# Altium PCB BananaSchplit-Mini-USBCPD-PCB.PcbDoc
Units mm, origin at the board's own origin, x right, y up, seen from the top; angles counter-clockwise.
Board outline 42.5 x 15 mm, 2 copper layers (Top Layer, Bottom Layer), stack 1.27 mm thick; 47 components, 30 nets, 159 pads, 125 vias.
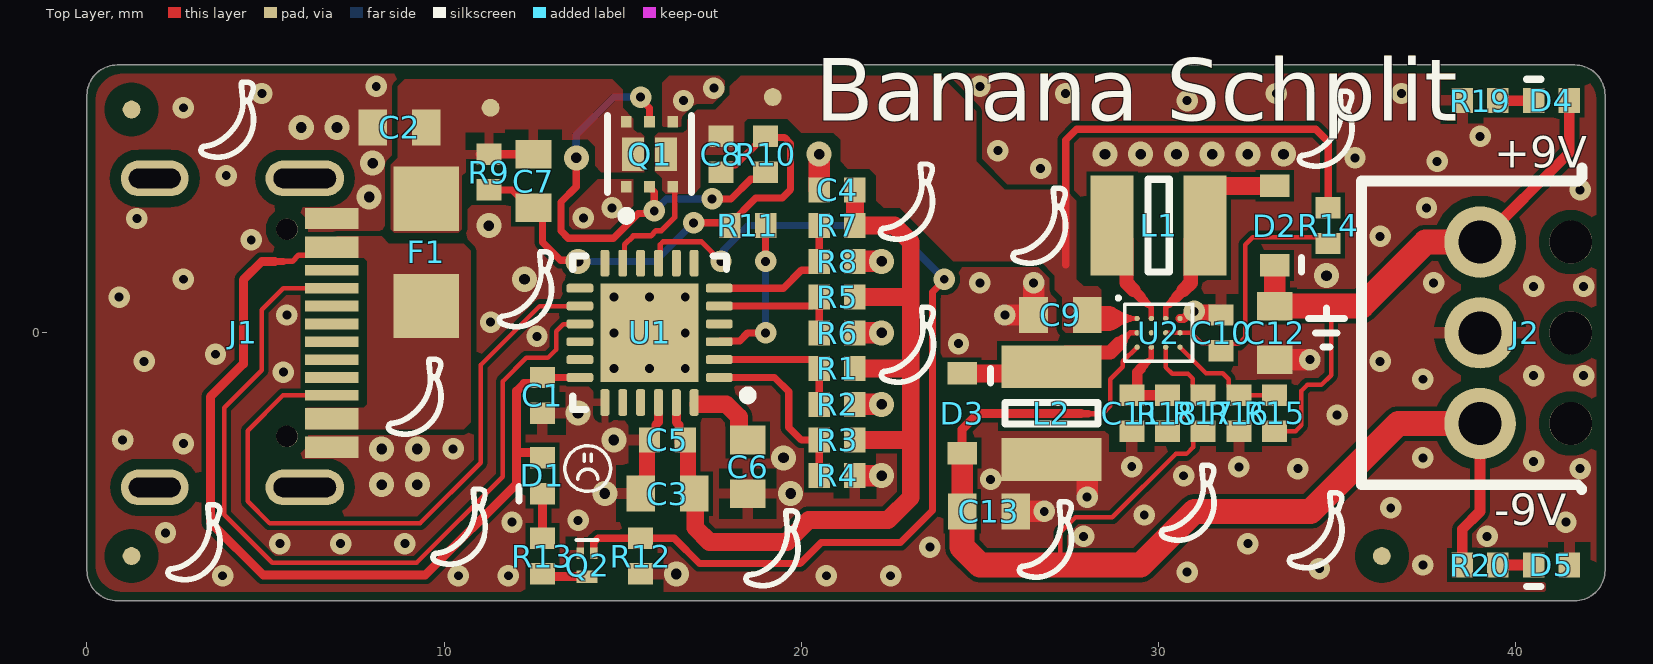
[diagram p0: Top Layer view]
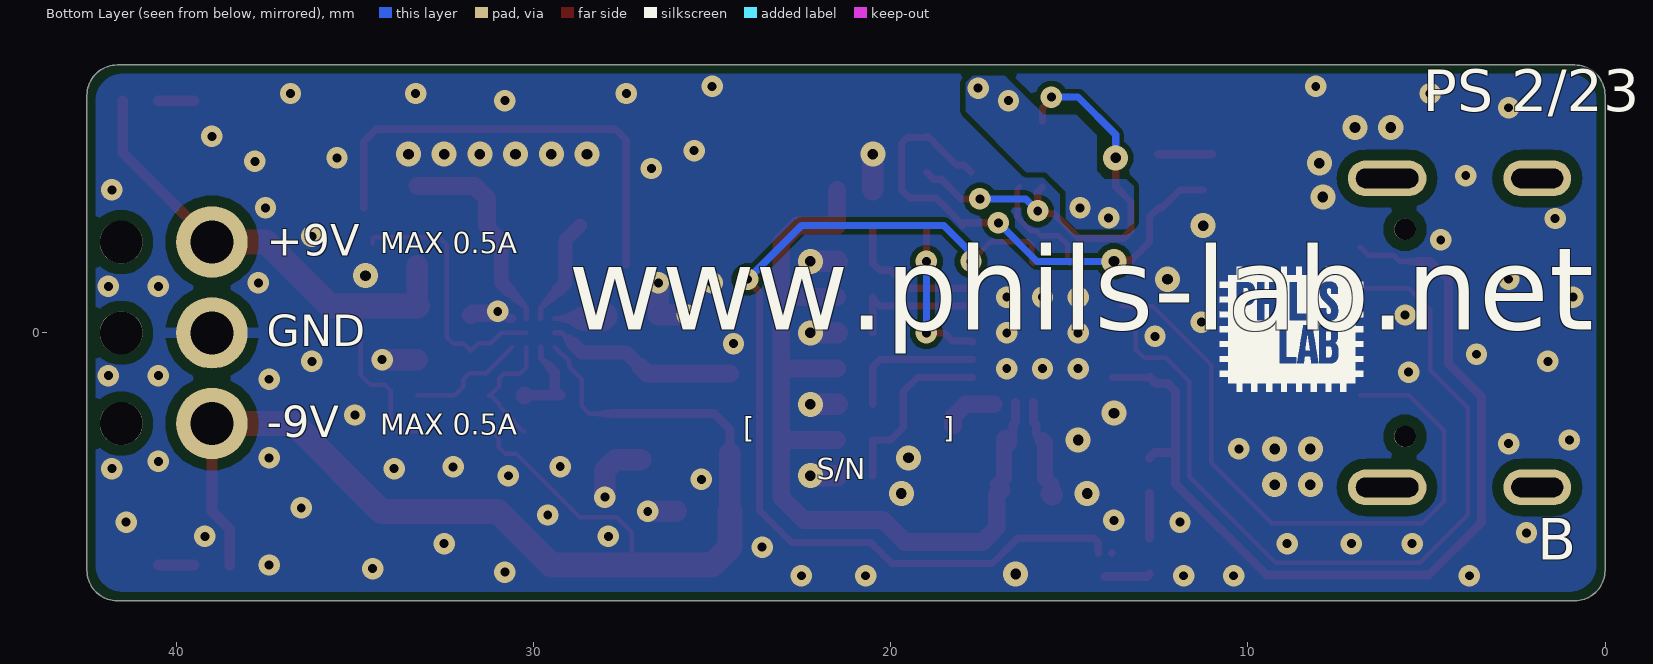
[diagram p1: Bottom Layer view, seen from below]
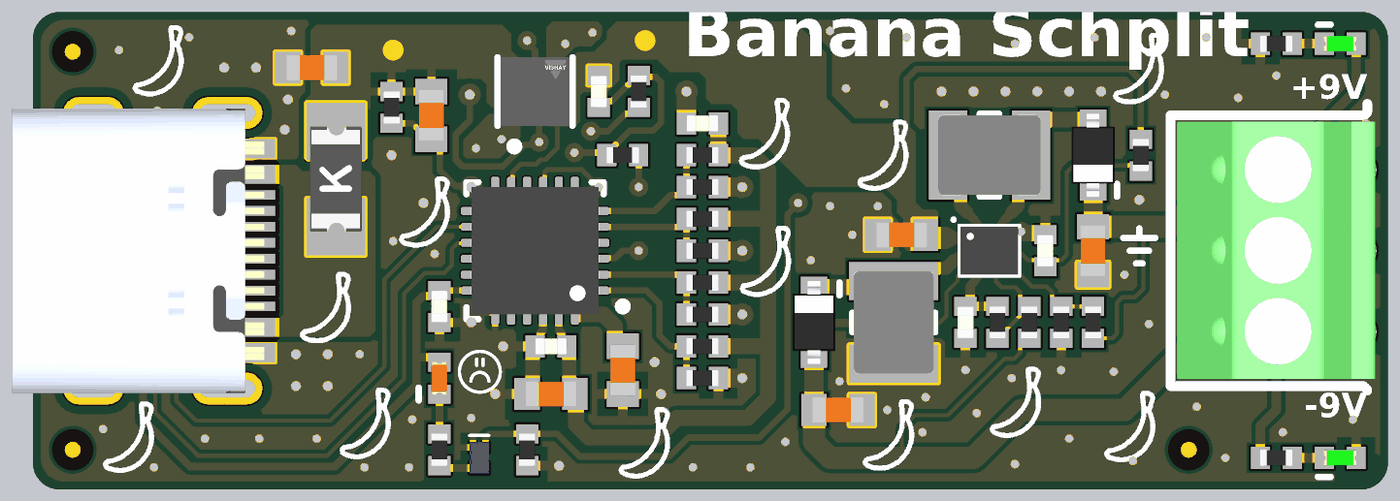
[diagram p2: 3D render of the assembled board from above, using the file's embedded part models]

## Layer stack, top to bottom
Top Solder: solder mask 0.0102, Solder Resist, Dk 3.5
Top Layer: signal copper 0.035
Dielectric 1: dielectric 1.2, FR-4, Dk 4.6
Bottom Layer: signal copper 0.035
Bottom Solder: solder mask 0.0102, Solder Resist, Dk 3.5

## Board outline
0,-6.646 0,6.646 cw(c0.854,6.646) 0.854,7.5 41.646,7.5 cw(c41.646,6.646) 42.5,6.646 42.5,-6.646 cw(c41.646,-6.646) 41.646,-7.5 0.854,-7.5 cw(c0.854,-6.646)

## Design rules (kind name [scope] priority, off if disabled: settings)
Clearance [All] p1: gap=0.152 ignorepadtopadclearanceinfootprint=FALSE except(0.13: Arc-Arc Arc-Track Arc-SMDPad Arc-Fill Arc-Poly Arc-Region Track-Track Track-SMDPad Track-Fill Track-Poly Track-Region SMDPad-Fill SMDPad-Poly SMDPad-Region; 0.25: Arc-Hole Track-Hole SMDPad-Hole THPad-Hole Via-Hole Fill-Hole Poly-Hole Region-Hole; 0.3: Arc-THPad Track-THPad SMDPad-THPad THPad-THPad THPad-Fill THPad-Poly THPad-Region)
HoleSize [All] p1: absolutevalues=TRUE maxlimit=5 minlimit=0.25 maxpercent=80.000 minpercent=20.000
MinimumSolderMaskSliver [All] p1: minsoldermaskwidth=0.125
PolygonConnect [All] p1: connectstyle=Direct reliefconductorwidth=0.254 reliefentries=4 polygonreliefangle="90 Angle" airgapwidth=0.254
RoutingVias [All] p1: holewidth=0.25 width=0.6 viastyle="Through Hole" minholewidth=0.25 minwidth=0.6 maxholewidth=0.4 maxwidth=1
SilkToSilkClearance [All] p1: silktosilkclearance=0.2
SilkToSolderMaskClearance [IsPad] p1: minsilkscreentomaskgap=0.15 clearancetoexposedcopper=TRUE
SolderMaskExpansion [All] p1: expansion=0.075 istentingtop=FALSE
Width [All] p1: maxlimit=2 minlimit=0.127 preferedwidth=0.2
26 further rules are at their usual default settings.

## Components (designator, comment, footprint, x,y, rotation, side; value= is the part's Value field where it differs from the comment)
C1 "100n" CAP_0402 12.75,-1.75 r90 top
C2 "4u7" CAP_0603 8.75,5.75 r0 top
C3 "4u7" CAP_0603 16.25,-4.5 r0 top
C4 "100n" CAP_0402 21,4 r0 top
C5 "100n" CAP_0402 16.25,-3 r0 top
C6 "4u7" CAP_0603 18.5,-3.75 r90 top
C7 "4u7" CAP_0603 12.5,4.25 r90 top
C8 "DNP" CAP_0402 17.75,5 r90 top
C9 "4u7" CAP_0603 27.25,0.5 r0 top
C10 "100n" CAP_0402 31.75,0 r270 top
C11 "100n" CAP_0402 29.25,-2.25 r90 top
C12 "4u7" CAP_0603 33.25,0 r90 top
C13 "4u7" CAP_0603 25.25,-5 r180 top
D1 "RED" LED_0402_RED 12.75,-4 r270 top
D2 "PMEG1020EA,115" SOD-323 33.25,3 r270 top
D3 "PMEG1020EA,115" SOD-323 24.5,-2.25 r90 top
D4 "GREEN" LED_0402_GREEN 41,6.5 r180 top
D5 "GREEN" LED_0402_GREEN 41,-6.5 r180 top
F1 "2A" FUSE_1206 9.5,2.25 r90 top
J1 "TYPE-C-31-M-12" TYPE-C-31-M-12 4,0 r270 top locked
J2 "1725669" 1725669 39,0 r90 top locked
L1 "4u7" SRP3212A 30,3 r0 top
L2 "4u7" SRP3212A 27,-2.25 r90 top
Q1 "SIA931DJ-T1-GE3" FP-C-07431-DUAL-MFG 15.75,5 r0 top locked
Q2 "SSM3K72KCT,L3F" CST3-SOT-883 14,-6.5 r0 top
R1 "DNP" RES_0402 21,-1 r0 top
R2 "0R" RES_0402 21,-2 r180 top
R3 "DNP" RES_0402 21,-3 r0 top
R4 "0R" RES_0402 21,-4 r180 top
R5 "20k" RES_0402 21,1 r0 top
R6 "20k" RES_0402 21,0 r180 top
R7 "DNP" RES_0402 21,3 r0 top
R8 "0R" RES_0402 21,2 r180 top
R9 "20k" RES_0402 11.25,4.5 r90 top
R10 "0R" RES_0402 19,5 r270 top
R11 "2k2" RES_0402 18.5,3 r180 top
R12 "180k" RES_0402 15.5,-6.25 r90 top
R13 "2k2" RES_0402 12.75,-6.25 r90 top
R14 "20k" RES_0402 34.75,3 r90 top
R15 "205k" RES_0402 33.25,-2.25 r270 top
R16 "20k" RES_0402 32.25,-2.25 r90 top
R17 "180k" RES_0402 31.25,-2.25 r270 top
R18 "20k" RES_0402 30.25,-2.25 r270 top
R19 "2k2" RES_0402 39,6.5 r0 top
R20 "2k2" RES_0402 39,-6.5 r0 top
U1 "CYPD3177-24LQXQ" QFN-24-0MM5 15.75,0 r180 top
U2 "BD8316GWL-E2" UCSP50L1 30,0 r0 top

## Footprints (in the part's own frame and the unit in brackets; to place one, negate y for a bottom-side part, rotate by r counter-clockwise, add the part's x,y. Pads: shape width x height; smd on the part's side, far side on the other; paste and mask are expansions set on the pad)
1725669 [mm]
  round 2 hole 1.2: 1(-2.54,0) 2(0,0) 3(2.54,0)
  round 1.2 hole 1.2 unplated: MH(-2.54,-2.54) MH(0,-2.54) MH(2.54,-2.54)
  silkscreen extent -4.39,-2.85 4.25,3.32, body extent -4.03,-3.1 4.05,3.1, height 8.51
CAP_0402 [mm]
  rect 0.6x0.7 smd: 1(-0.5,0) 2(0.5,0)
  body extent -0.5,-0.26 0.5,0.26, height 0.37
CAP_0603 [mm]
  rect 0.8x1 smd: 1(-0.75,0) 2(0.75,0)
  body extent -0.8,-0.4 0.8,0.4, height 0.51
CST3-SOT-883 [mm]
  rect 0.6x0.35 smd: D(0,-0.325)
  rect 0.22x0.32 smd: G(0.19,0.325) S(-0.19,0.325)
  silkscreen extent -0.3,0.7 0.3,0.7, body extent -0.3,-0.5 0.3,0.5, height 0.39
FP-C-07431-DUAL-MFG [mm]
  rect 0.3x0.325 smd paste+0 mask+0: 1(-0.65,-0.913) 2(0,-0.913) 3(0.65,-0.913) 4(0.65,0.913) 5(0,0.913) 6(-0.65,0.913)
  rect 0.613x0.95 smd paste+0 mask+0: 7(-0.466,0) 8(0.466,0)
  silkscreen extent -1.17,-1.85 1.17,1.07, body extent -1.17,-1.17 1.17,1.17, height 0.25
FUSE_1206 [mm]
  rect 1.8x1.84 smd: 1(-1.5,0) 2(1.5,0)
  body extent -1.65,-0.82 1.65,0.81, height 0.84
LED_0402_GREEN [mm]
  rect 0.6x0.7 smd: A(-0.5,0) K(0.5,0)
  body extent -0.51,-0.25 0.51,0.25, height 0.45
LED_0402_RED [mm]
  rect 0.6x0.7 smd: A(-0.5,0) K(0.5,0)
  body extent -0.51,-0.25 0.51,0.25, height 0.45
QFN-24-0MM5 [mm]
  rrect50% 0.75x0.25 smd mask+0.05: 1(-1.95,1.25) 2(-1.95,0.75) 3(-1.95,0.25) 4(-1.95,-0.25) 5(-1.95,-0.75) 6(-1.95,-1.25) 13(1.95,-1.25) 14(1.95,-0.75) 15(1.95,-0.25) 16(1.95,0.25) 17(1.95,0.75) 18(1.95,1.25)
  rrect50% 0.25x0.75 smd mask+0.05: 7(-1.25,-1.95) 8(-0.75,-1.95) 9(-0.25,-1.95) 10(0.25,-1.95) 11(0.75,-1.95) 12(1.25,-1.95) 19(1.25,1.95) 20(0.75,1.95) 21(0.25,1.95) 22(-0.25,1.95) 23(-0.75,1.95) 24(-1.25,1.95)
  rect 2.75x2.75 smd mask+0.3: 25(0,0)
  silkscreen extent -2.87,-2.15 2.15,2.15, body extent -2,-2 2,2, height 0.6
RES_0402 [mm]
  rect 0.6x0.7 smd: 1(-0.5,0) 2(0.5,0)
  body extent -0.5,-0.25 0.5,0.25, height 0.3
SOD-323 [mm]
  rect 0.63x0.83 smd: A(-1.115,0) K(1.115,0)
  body extent -1.3,-0.68 1.3,0.68, height 1.1
SRP3212A [mm]
  rect 1.2x2.8 smd: 1(-1.3,0) 2(1.3,0)
  silkscreen extent -0.3,-1.3 0.3,1.3, body extent -1.61,-1.26 1.61,1.26, height 1.15
TYPE-C-31-M-12 [mm]
  rect 0.6x1.5 smd mask+0.07: A1B12(-3.2,2.85) B1A12(3.2,2.85)
  rect 0.6x1.5 smd mask+0.14: A4B9(-2.4,2.85) B4A9(2.4,2.85)
  rect 0.3x1.5 smd mask+0.14: A5(-1.25,2.85) A6(-0.25,2.85) A7(0.25,2.85) A8(1.25,2.85) B5(1.75,2.85) B6(0.75,2.85) B7(-0.75,2.85) B8(-1.75,2.85)
  round 0.6 hole 0.6 unplated mask+0.3: MH(-2.9,1.6) MH(2.9,1.6)
  oval 1x2.2 hole 0.55 slot 1.75 at 90 deg mask+0.05: SH(-4.325,2.1) SH(4.325,2.1)
  oval 1x1.9 hole 0.55 slot 1.45 at 90 deg mask+0.05: SH(-4.325,-2.1) SH(4.325,-2.1)
  body extent -4.47,-4.65 4.47,3.25, height 3.32
UCSP50L1 [mm]
  round 0.15 smd: A1(-0.6,0.4) A2(-0.2,0.4) A3(0.2,0.4) A4(0.6,0.4) B1(-0.6,0) B2(-0.2,0) B3(0.2,0) B4(0.6,0) C1(-0.6,-0.4) C2(-0.2,-0.4) C3(0.2,-0.4) C4(0.6,-0.4)
  silkscreen extent -1.17,-0.8 0.95,1.02, body extent -0.9,-0.75 0.9,0.75, height 0.55

## Part data
C1 C4 C5 C10 C11: library part CAP_0402_25V, "Capacitor SMD 0402 25V", Manufacturer=Murata, Manufacturer Part Number=GRM155R71H104KE14D, Distributor Link=https://www.mouser.de/ProductDetail/Murata-Electronics/GRM155R71H104KE14D?qs=2UZY3JfgLCy9gG9icKV9Yg%3D%3D
C2 C3 C6 C7 C9 C12 C13: library part CAP_0603_25V, "Capacitor SMD 0603 25V", Manufacturer=Murata, Manufacturer Part Number=GRT188R61E475ME13D, Distributor Link=https://www.mouser.de/ProductDetail/Murata-Electronics/GRT188R61E475ME13D?qs=sGAEpiMZZMvsSlwiRhF8qquPIBdUMwzgRaX4X%2FWWRln9HlRbg8TjFQ%3D%3D
C8: library part CAP_0402_25V, "Capacitor SMD 0402 25V"
D1: library part LED_0402_RED, "LED 0402 RED SMD", Manufacturer=Lite-On, Manufacturer Part Number=LTST-C281KRKT, Distributor Link=https://www.mouser.de/ProductDetail/Lite-On/LTST-C281KRKT?qs=xb8aMrBSZRKAPWJcmf%2F7XQ%3D%3D
D2 D3: library part D_SCHOTTKY_SOD_323, "Diode Schottky SMD SOD-323", Manufacturer=Nexperia, Distributor Link=https://www.mouser.de/ProductDetail/Nexperia/PMEG1020EA115?qs=LOCUfHb8d9vgI3RbmovPSQ%3D%3D, Manufacturer Part Number=PMEG1020EA,115
D4 D5: library part LED_0402_GREEN, "LED 0402 GREEN SMD", Manufacturer=Lite-On, Manufacturer Part Number=LTST-C281KGKT, Distributor Link=https://www.mouser.de/ProductDetail/Lite-On/LTST-C281KGKT?qs=xb8aMrBSZRJ6%2FVAKgwiAkw%3D%3D
F1: library part FUSE_PPTC_1206, "Fuse PPTC SMD 1206", Manufacturer=Eaton, Manufacturer Part Number=PTS12066V200, Distributor Link=https://www.mouser.de/ProductDetail/Bussmann-Eaton/PTS12066V200?qs=QmibqUXyDhS%2F0O9QsSQTuw%3D%3D
J1: "USB Type C Connector Horizontal SMT", LCSC=C165948, Manufacturer="Koren Hroparts", Distributor Link=https://www.lcsc.com/product-detail/USB-Connectors_Korean-Hroparts-Elec-TYPE-C-31-M-12_C165948.html, Manufacturer Part Number=TYPE-C-31-M-12
J2: "Screw Terminal Block 3 Positions 2.54mm", Manufacturer=Phoenix, Distributor Link=https://www.mouser.de/ProductDetail/Phoenix-Contact/1725669?qs=A%2FKWGUWTCZjmkTL0Oe91ew%3D%3D, Manufacturer Part Number=1725669
L1 L2: library part SRP3212A-*, "Shielded Power Inductor SMD SRP3212A", Manufacturer=Bourns, Manufacturer Part Number=SRP3212A-4R7M, Distributor Link=https://www.mouser.de/ProductDetail/Bourns/SRP3212A-4R7M?qs=t7xnP681wgUDaQ9KSPrZtA%3D%3D
Q1: library part CMP-02550-000157-1, "MOSFET 2P-CH 30V 4.5A SC70-6L", Continuous Drain Current=-4.3A, Drain To Source Breakdown Voltage=-30V, Drain To Source Resistance=0.052Ω, Gate To Source Voltage=20V, Input Capacitace At Vds="445pF @ -15V", Manufacturer=Vishay, Max Forward Diode Voltage=-1.2V, Max Junction Temp=+150°C, Package=C-07431-DUAL, Power Dissipation=1.9W, Pulse Drain Current=-28A, Temperature="-55°C to +150°C", Temperature Range Low=-55°C, Typ Forward Diode Voltage=-0.9V, Automotive=No, Category=Trans, ComponentLink2Description=Datasheet, ComponentLink2URL=http://www.vishay.com/docs/62859/sia931dj.pdf, Depletion Mode=False, Device Class L1="Discrete Semiconductors", Device Class L2=Transistors, Device Class L3=MOSFETs, Digikey Description="MOSFET 2P-CH 30V 4.5A SC70-6L", Distributor Link=https://www.mouser.de/ProductDetail/Vishay-Semiconductors/SIA931DJ-T1-GE3?qs=c9a7l%2FSwUkL86B%2FuBqErTg%3D%3D, Drain To Source Voltage=-30V, Gate Charge At Vgs="8.5nC @ -10V", Height=0.8mm, Lead Free=Yes, Manufacturer Part Number=SIA931DJ-T1-GE3, Number of Channels=2, Number Of P Channels=2, Octopart=https://octopart.com/sia931dj-t1-ge3-vishay-46488088, Reverse Recovery Charge=8nC, Reverse Recovery Time=15ns, RoHS=TRUE, Rthja Max=52°C/W, Standoff Height=0mm, Temperature Range High=+150°C, Threshold Vgs Max=-2.2V, Threshold Vgs Min=-1.2V, Transconductance=8S, Turn Off Delay Time=20ns, Turn On Delay Time=8ns
Q2: "MOSFET N-Channel Vds=60V Id=400mA Rds(on)=1.05R with ESD Protection", Manufacturer=Toshiba, Distributor Link=https://www.mouser.de/ProductDetail/Toshiba/SSM3K72KCTL3F?qs=PDgMCp4xDJZBSQ%2Fqg29QOw%3D%3D, Manufacturer Part Number=SSM3K72KCT,L3F
R1 R3 R7: library part RES_0402, "Resistor SMD 0402"
R2 R4 R8 R10: library part RES_0402, "Resistor SMD 0402", Manufacturer=YAGEO, Manufacturer Part Number=RC0402FR-070RL, Distributor Link=https://www.mouser.de/ProductDetail/YAGEO/RC0402FR-070RL?qs=sxZXDnvRBEhfSy4CZGX2ww%3D%3D
R5 R6 R9 R14 R16 R18: library part RES_0402, "Resistor SMD 0402", Manufacturer=YAGEO, Manufacturer Part Number=RC0402FR-0720KL, Distributor Link=https://www.mouser.de/ProductDetail/YAGEO/RC0402FR-0720KL?qs=V1yeUXFNrklxRvgYM5JI2A%3D%3D
R11 R13 R19 R20: library part RES_0402, "Resistor SMD 0402", Manufacturer=YAGEO, Manufacturer Part Number=RC0402FR-072K2L, Distributor Link=https://www.mouser.de/ProductDetail/YAGEO/RC0402FR-072K2L?qs=YUgVZYePFqCtk4LkRUkHoA%3D%3D
R12 R17: library part RES_0402, "Resistor SMD 0402", Manufacturer=YAGEO, Manufacturer Part Number=RC0402FR-07180KL, Distributor Link=https://www.mouser.de/ProductDetail/YAGEO/RC0402FR-07180KL?qs=V1yeUXFNrkktQqb8%2Fwvwvg%3D%3D
R15: library part RES_0402, "Resistor SMD 0402", Manufacturer=YAGEO, Manufacturer Part Number=RC0402FR-07205KL, Distributor Link=https://www.mouser.de/ProductDetail/YAGEO/RC0402FR-07205KL?qs=UOUeRUa%252B8WmAlokY7gqvbQ%3D%3D
U1: "USB Type-C Port Controller for Power Sinks", LCSC=C2959321, Manufacturer="Cypress Semicon", Distributor Link=https://www.lcsc.com/product-detail/USB-ICs_Cypress-Semicon-CYPD3177-24LQXQ_C2959321.html, Manufacturer Part Number=CYPD3177-24LQXQ
U2: "Step-up and inverted 2-channel DC/DC converter with Built-in Power MOSFET 1.6MHz 1A", Manufacturer=ROHM, Distributor Link=https://www.mouser.de/ProductDetail/ROHM-Semiconductor/BD8316GWL-E2?qs=9Cg39qEKpi4sbGytSKsU5Q%3D%3D, Manufacturer Part Number=BD8316GWL-E2

## Free pads (board coordinates)
  round 0.5 smd paste-0.25 mask+0.4: FM(1.25,-6.25) FM(1.25,6.25) FM(36.25,-6.25)
  round 0.5 smd paste-0.25: TP(11.3,6.3) TP(19.2,6.6)

## Via types
v1: diameter 0.6, hole 0.25, Top Layer to Bottom Layer, tented both sides, 95 vias
v2: diameter 0.7, hole 0.3, Top Layer to Bottom Layer, tented both sides, 30 vias

## Nets (pads, with @x,y where several pads share a name; then routed paths per layer and width w, separated by ;. In a path a pad name is that pad's centre, name@x,y a point inside that pad or via, vN(x,y) a via of type N, cw(c..) or ccw(c..) an arc to the next point about the centre after c; other vN are vias at no path point)
+3V3: C3.2 C4.2 C5.2 R1.2 R3.2 R5.2 R7.2 U1.23 | length 25.2
  Top Layer w0.25: U1.23 16.5,-2.5 16.575,-2.575 16.575,-2.825 C5.2 C5.2@16.576,-2.826
  Top Layer w0.45: C5.2 16.825,-3.075 16.825,-4.075 C3.2@17,-4.25
  Top Layer w0.5: C3.2@16.896,-4.396 C3.2 17.03,-4.53 17.03,-5.458 17.431,-5.858 19.593,-5.858 20.208,-5.243 22.425,-5.243 23.061,-4.606 23.061,-2.969 ; R3.2 23.031,-3 23.061,-2.969 ; R1.2 23.061,-1 ; R5.2 23.061,1 ; C4.2 R7.2 22.607,3 23.061,2.545 23.061,1 ; 23.061,-2.969 23.061,-1 ; 23.061,-1 23.061,1
  Top Layer w0.6: C5.2@16.75,-3.05 C5.2
+5V: C8.2 C9.2 pad.TP@19.2,6.6 Q1.3 Q1.8 R14.2 U1.11 U2.A1 | length 17.6
  Top Layer w0.15: U1.11 15.05,2 15.05,2.471 15.296,2.716 15.791,2.716 15.934,2.859 16.08,2.859 16.451,3.231 16.451,4.036 Q1.3 ; 29.2,0.4 U2.A1
  Top Layer w0.2: 27.4,1.9 27.4,5.4 27.7,5.7 34.4,5.7 34.75,5.35 R14.2 ; 29.1,0.4 29.2,0.4
  Top Layer w0.25: 29,0.4 29.1,0.4
  Top Layer w0.3: 28.9,0.4 29,0.4
  Top Layer w0.4: 28.8,0.4 28.9,0.4
  Top Layer w0.5: 28.7,0.4 28.8,0.4
  Top Layer w0.6: 28.6,0.4 28.7,0.4
  Top Layer w0.7: C9.2 28,0.45 28.05,0.4 28.6,0.4
+9V: C12.2 D2.K D4.A J2.3 R15.2 | length 17.4
  Top Layer w0.127: R15.2 33.841,-2.75 34,-2.591 34,-1.623 34.164,-1.459 34.557,-1.459 34.832,-1.184 34.832,0.582 35,0.75
  Top Layer w0.3: J2.3 41.5,5.04 D4.A
  Top Layer w0.6: C12.2 D2.K
  Top Layer w0.7: C12.2 35,0.75 35.689,0.75 37.479,2.54 J2.3
+VBUS: C1.2 D1.A F1.1 J1.A4B9 J1.B4A9 U1.18 | length 25.5
  Top Layer w0.15: 5.5,2 5.75,2 5.925,2.175 6.625,2.175 J1.A4B9
  Top Layer w0.2: 5.25,2 5.5,2 ; C1.2 U1.18
  Top Layer w0.25: 5.25,2 4.901,2 4.383,1.482 4.383,-0.867 3.457,-1.793 3.457,-5.301 4.936,-6.779 9.471,-6.779 12.031,-4.219 12.031,-3.344 12.031,-1.63 12.24,-1.421 12.579,-1.421 C1.2 ; 12.056,-3.344 12.594,-3.344 D1.A
+VBUS_F: C2.2 C7.2 F1.2 pad.TP@11.3,6.3 Q1.6 Q1.7 R9.2 | length 1.5
  Top Layer w0.25: R9.2@11,5 C7.2
-9V: C13.2 D3.A J2.1 R17.2 R20.1 U2.C1 | length 36.4
  Top Layer w0.127: 27.25,-6.5 27.25,-5.586 27.673,-5.163 28.708,-5.163 30.479,-3.391 30.78,-3.391 30.966,-3.206 30.966,-2.987 31.202,-2.75 R17.2 ; 28.2,-2.264 28.434,-2.264 28.652,-2.046 28.652,-1.299 29,-0.951 29,-0.8 U2.C1
  Top Layer w0.15: 28.036,-2.264 28.2,-2.264
  Top Layer w0.2: 27.836,-2.264 28.036,-2.264
  Top Layer w0.25: D3.A 24.5,-2.7 24.936,-2.264 27.836,-2.264
  Top Layer w0.3: R20.1 38.5,-5.5 39,-5 J2.1
  Top Layer w0.6: C13.2 D3.A
  Top Layer w0.7: C13.2 24.5,-6 25,-6.5 27.25,-6.5 29.5,-6.5 31,-5 34.25,-5 36.71,-2.54 J2.1
CC1: J1.A5 U1.15 | length 23.5
  Top Layer w0.127: J1.A5 5.5,1.25 4.892,0.642 4.892,-1.05 3.841,-2.1 3.841,-5.094 5.184,-6.437 9.228,-6.437 11.638,-4.026 11.638,-1.362 12.299,-0.701 12.906,-0.701 13.139,-0.467 13.139,0.046 13.332,0.239 13.789,0.239 U1.15
CC2: J1.B5 U1.14 | length 18.2
  Top Layer w0.127: J1.B5 5.489,-1.75 4.5,-2.739 4.5,-4.719 5.113,-5.332 9.326,-5.332 11.024,-3.634 11.024,-0.899 12.673,0.75 U1.14@13.55,0.75
FAULT: Q2.G R12.2 U1.9 | length 27.3
  Top Layer w0.15: U1.9 16.05,2 16.05,2.465 16.138,2.553 17.197,2.553 v1(17.75,2)
  Top Layer w0.2: Q2.G 14.19,-5.867 14.307,-5.75 R12.2 16.442,-5.75 17.15,-6.458 19.967,-6.458 20.559,-5.866 22.776,-5.866 23.67,-4.972 23.67,1.142 24,1.473 v1(24,1.5)
  Bottom Layer w0.2: v1(17.75,2) 17.827,2.077 17.827,2.322 18.505,3 22.5,3 v1(24,1.5)
FET_FAULT_D: Q2.D R13.1 | length 1.3
  Top Layer w0.25: R13.1 12.825,-6.825 Q2.D
GND: C1.1 C2.1 C3.1 C4.1 C5.1 C6.1 C9.1 C10.1 C11.1 C12.1 C13.1 D5.A J1.A1B12 J1.B1A12 J2.2 L2.1 Q2.S R2.1 R4.1 R6.1 R8.1 R12.1 R16.1 R19.1 U1.19 U1.22 U1.25 U2.A4 | length 13.2
  Top Layer w0.2: Q2.S@13.8,-6.165 Q2.S
  Top Layer w0.25: C5.1 15.925,-2.825 15.925,-2.575 16,-2.5 U1.22 ; U2.A4 30.705,0.4 30.905,0.6 v1(31,0.6)
  Top Layer w0.45: C3.1@15.5,-4.25 15.675,-4.075 15.675,-3.075 C5.1
  Top Layer w0.5: v2(13.75,-2.25) v2@13.804,-2.25 ; v1(31,0.6) 31.027,0.6 31.077,0.55 31.7,0.55 C10.1
  Top Layer w0.6: C3.1@15.469,-4.531 C3.1 ; C4.1 v2(20.5,5) ; R4.1 v2(22.248,-4) ; R2.1 v2(22.248,-2) ; R6.1 v2(22.248,0) ; R8.1 v2(22.248,2) ; v1(25.7,0.5) C9.1 v1(26.5,1.4) ; C13.1 v1(26.8,-5) ; L2.1 27.7,-3.55 28,-3.85 v1(28,-4.6) ; C12.1 v1(34.234,-0.75)
  other v1: 3.8,-6.8 10.4,-6.8 11.8,-6.8 20.7,-6.8 22.5,-6.8 30.8,-6.7 34.5,-6.6 37.4,-6.5 23.6,-6 5.4,-5.9 7.1,-5.9 8.9,-5.9 32.5,-5.9 27.9,-5.7 39.2,-5.7 2.2,-5.6 11.9,-5.3 41.4,-5.3 13.75,-5.25 29.6,-5.1 36.5,-4.9 25.3,-4.1 30.7,-4 33.9,-3.8 41.8,-3.8 29.249,-3.745 32.25,-3.75 40.5,-3.6 37.4,-3.5 10.25,-3.25 2.7,-3.1 1,-3 35,-2.3 37.4,-1.3 40.5,-1.2 41.9,-1.2 5.5,-1.1 14.75,-1 15.75,-1 16.75,-1 1.6,-0.8 36.2,-0.8 3.6,-0.6 24.4,-0.3 12.6,-0.1 14.75,0 16.75,0 11.3,0.3 5.6,0.5 0.9,1 14.75,1 15.75,1 16.75,1 40.5,1.3 41.9,1.3 25,1.4 37.7,1.4 2.7,1.5 4.6,2.6 36.2,2.7 1.4,3.2 37.5,3.5 41.8,4 3.9,4.4 26.7,4.6 37.8,4.8 35.5,4.9 25.5,5.1 39,5.5 2.7,6.3 30.8,6.5 4.9,6.7 27.4,6.7 33.3,6.7 36.8,6.7 8.1,6.9 25,6.9
  other v2: 16.5,-6.75 14.5,-4.5 19.7,-4.5 8.25,-4.25 9.25,-4.25 19.5,-3.5 8.25,-3.25 9.25,-3.25 14.75,-3 12.25,1.5 34.7,1.6 11.25,3 7.9,3.8 8,4.75 28.5,5 29.5,5 30.5,5 31.5,5 32.5,5 33.5,5 6,5.75 7,5.75
ISNK_CRS: R5.1 R6.2 U1.5 | length 3.9
  Top Layer w0.2: U1.5 20.3,0.75 20.5,0.95 R5.1 R6.2
ISNK_FIN: R7.1 R8.2 U1.6 | length 4.1
  Top Layer w0.2: U1.6 19.5,1.25 20,1.75 20.3,1.75 20.5,1.95 R8.2 R7.1
LED_FAULT_K: D1.K R13.2 | length 1.2
  Top Layer w0.25: R13.2 D1.K
LED_N9V_K: D5.K R20.2 | length 1
  Top Layer w0.3: R20.2 D5.K
LED_P9V_K: D4.K R19.2 | length 1
  Top Layer w0.3: R19.2 D4.K
PDC_VCCD: C6.2 U1.24 | length 1.5
  Top Layer w0.5: U1.24@17.125,-2 17.899,-2 18.25,-2.351 18.25,-2.6
POWER_MOS_DS: Q1.1 Q1.4
  other v1: 13.9,3.216 14.7,3.5 16.7,6.5 17.55,6.85
SW_EN: C10.2 R14.1 U2.B3 U2.B4 | length 7.5
  Top Layer w0.127: U2.B3 U2.B4 30.9,0 31.192,-0.292 31.542,-0.292 C10.2 31.95,-0.3 32.25,-0.3 32.425,-0.125 32.425,2.47 32.635,2.679 34.463,2.679 34.5,2.643 R14.1@34.5,2.5
SW_FB_BST: R15.1 R16.2 U2.C4 | length 3.3
  Top Layer w0.127: U2.C4 31.328,-1.128 31.798,-1.128 31.965,-1.295 31.965,-1.513 32.202,-1.75 R16.2 R15.1
SW_FB_INV: R17.1 R18.2 U2.C3 | length 3.5
  Top Layer w0.127: U2.C3 30.2,-0.97 30.38,-1.15 30.824,-1.15 30.963,-1.29 30.963,-1.514 R17.1@31.2,-1.75 ; R18.2@30.258,-2.75 30.3,-2.75 30.537,-2.514 30.537,-2.472 30.963,-2.045 30.963,-1.987 R17.1@31.2,-1.75 ; R17.1 R17.1@31.2,-1.75
SW_HS_BST: L1.1 U2.A2 | length 3.1
  Top Layer w0.15: 29.7,0.8 29.8,0.7 U2.A2
  Top Layer w0.2: 29.6,0.9 29.7,0.8
  Top Layer w0.25: 29.5,1 29.6,0.9
  Top Layer w0.3: 29.3,1.2 29.5,1
  Top Layer w0.4: L1.1 29.1,2.6 29.1,1.4 29.3,1.2
SW_L_BST: D2.A L1.2 U2.A3 | length 5.9
  Top Layer w0.15: U2.A3 30.2,0.7 30.3,0.8
  Top Layer w0.2: 30.3,0.8 30.4,0.9
  Top Layer w0.25: 30.4,0.9 30.5,1
  Top Layer w0.3: 30.5,1 30.7,1.2
  Top Layer w0.4: 30.7,1.2 30.9,1.4 30.9,2.6 L1.2
  Top Layer w0.5: L1.2 31.3,3.765 31.65,4.115 D2.A
SW_L_INV: D3.K L2.2 U2.B1 | length 5.4
  Top Layer w0.15: 29.1,-0.1 29.2,0 U2.B1
  Top Layer w0.2: 29,-0.2 29.1,-0.1
  Top Layer w0.3: 28.9,-0.3 29,-0.2
  Top Layer w0.4: L2.2 27.4,-0.55 28.65,-0.55 28.9,-0.3
  Top Layer w0.5: D3.K 26.815,-1.135 L2.2
SW_VREF: C11.2 R18.1 U2.C2 | length 2.6
  Top Layer w0.15: 29.7,-0.8 29.8,-0.7 U2.C2
  Top Layer w0.2: 29.6,-0.9 29.7,-0.8
  Top Layer w0.25: 29.5,-1 29.6,-0.9
  Top Layer w0.3: 29.5,-1 29.4,-1.1 29.4,-1.6 C11.2 R18.1
VBUS_FET_EN: R11.1 U1.3 | length 4.4
  Top Layer w0.2: U1.3 17.725,-0.225 18.275,-0.225 18.5,0 v1(19,0) ; v1(19,2) R11.1
  Bottom Layer w0.2: v1(19,0) v1(19,2)
VBUS_FET_EN_R: C7.1 C8.1 R9.1 R10.1 R11.2 | length 14.4
  Top Layer w0.2: R9.1 11.9,4 12.4,3.5 C7.1 12.755,3.245 12.755,2.536 13.261,2.03 13.72,2.03 v2(13.75,2) ; v1(16.983,3.08) 17.92,3.08 R11.2 18,3.05 18.723,3.773 19.465,3.773 19.7,4.008 19.7,5.3 19.533,5.467 19.033,5.467 R10.1 18.95,5.5 18.75,5.3 18.75,5.29 18.16,4.7 17.95,4.7 C8.1
  Bottom Layer w0.2: v2(13.75,2) 15.903,2 v1(16.983,3.08)
VBUS_FET_G: Q1.2 Q1.5 R10.2 | length 13.2
  Top Layer w0.2: v2(13.7,4.9) 13.7,4.09 13.268,3.659 13.268,2.856 13.476,2.649 14.738,2.649 15.425,3.336 15.805,3.336 v1(15.881,3.412) 15.881,3.944 15.8,4.025 15.8,4.038 Q1.2 ; v1(15.5,6.6) 15.5,6.548 15.75,6.298 Q1.5 ; v1(17.5,3.75) 18.031,3.75 18.581,4.3 18.8,4.3 R10.2
  Bottom Layer w0.2: v2(13.7,4.9) 13.7,5.547 14.753,6.6 v1(15.5,6.6) ; v1(15.881,3.412) 16.219,3.75 v1(17.5,3.75)
VBUS_MAX: R1.1 R2.2 U1.2 | length 3.9
  Top Layer w0.2: U1.2 20.3,-0.75 20.5,-0.95 R2.2
VBUS_MIN: R3.1 R4.2 U1.1 | length 5.1
  Top Layer w0.2: U1.1 19.25,-1.25 19.646,-1.646 19.646,-2.646 20,-3 R3.1 R4.2
pads on no net: J1.A6 J1.A7 J1.A8 J1.B6 J1.B7 J1.B8 J1.MH J1.SH J2.MH U1.4 U1.7 U1.8 U1.10 U1.12 U1.13 U1.16 U1.17 U1.20 U1.21 U2.B2

## Polygon pours and split planes (outlines as drawn)
GND on Top Layer "GND_L1" (solid, pour order 8): 0.25,6.5 cw(c1,6.5) 1,7.25 41.5,7.25 cw(c41.5,6.5) 42.25,6.5 42.25,-6.5 cw(c41.5,-6.5) 41.5,-7.25 1,-7.25 cw(c1,-6.5) 0.25,-6.5
+VBUS_F on Top Layer "NONET_L01_P-001" (solid, pour order 7): 10.5,4.4 10.6,4.5 11.8,4.5 12,4.3 13,4.3 13.1,4.4 13.1,5.2 13.3,5.4 14.04,5.4 14.225,5.215 14.225,4.675 14.4,4.5 15.6,4.5 15.6,5.5 15.5,5.6 15.4,5.6 15.3,5.7 15.3,6 15,6.3 15,6.8 14.7,7.1 8.9,7.1 8.7,6.9 8.7,4.9 8.5,4.7 8.5,2.9 8.6,2.8 10.4,2.8 10.5,2.9
POWER_MOS_DS on Top Layer "NONET_L01_P-001" (solid, pour order 4): 14.645,2.9 15.3,3.555 15.3,4.3 14.3,4.3 13.7,3.7 13.5,3.5 13.5,3 13.6,2.9
+5V on Top Layer "NONET_L01_P-001" (solid, pour order 1): 16.8,5.961 17.083,6.244 17.583,6.244 18.002,6.663 18.002,6.902 18.3,7.2 23.9,7.2 24.9,6.2 24.9,4.8 25.7,4 27.4,4 27.7,3.7 27.7,1.5 27.9,1.3 28.3,1.3 28.4,1.2 28.4,0 27.4,0 27.3,0.1 27.3,1 27.1,1.2 27.1,1.6 26.7,2 24.25,2 22.75,3.5 22.3,3.5 22.1,3.7 22.1,4.4 21.9,4.6 21.3,4.6 21.1,4.8 21.1,5.4 20.9,5.6 20,5.6 19.6,6 18.5,6 18.398,5.898 18.398,5.36 18.023,4.985 17.285,4.985 17.171,4.871 17.171,4.071 17,3.9 16.2,3.9 16.1,4 16.1,4.323 15.9,4.523 15.9,5.5 16,5.6 16.7,5.6 16.8,5.7
POWER_MOS_DS on Top Layer "NONET_L01_P-001" (solid, pour order 3): 16.551,5.7 16.654,5.802 16.654,6.029 17.003,6.378 17.51,6.378 17.855,6.723 17.855,7.053 17.708,7.2 16.3,7.2 16.1,7 16.1,5.8 16.2,5.7
+VBUS on Top Layer "NONET_L01_P-001" (solid, pour order 0): 6.15,2.7 8.25,2.7 8.45,2.5 10.55,2.5 10.75,2.3 10.75,-2.5 10.55,-2.7 8.05,-2.7 6.15,-2.7 6.15,-2.1 7.75,-2.1 7.85,-2 7.85,2 7.75,2.1 6.15,2.1
GND on Bottom Layer "GND_L2" (solid, pour order 6): 0.25,6.5 cw(c1,6.5) 1,7.25 41.5,7.25 cw(c41.5,6.5) 42.25,6.5 42.25,-6.5 cw(c41.5,-6.5) 41.5,-7.25 1,-7.25 cw(c1,-6.5) 0.25,-6.5
POWER_MOS_DS on Bottom Layer "NONET_L01_P-001" (solid, pour order 5): 14.8,2.9 15.1,3.2 15.1,3.947 15.653,4.5 16.2,4.5 17.9,6.2 17.9,7 17.7,7.2 17.3,7.2 16.8,7.2 16.2,6.6 15.7,6.1 14.8,6.1 14.236,5.536 14.236,4.536 14,4.3 13.4,4.3 13.2,4.1 13.2,3.1 13.4,2.9

## Other copper
Top Layer:
  pour cut-out: 36.25,-5.5 cw(c36.25,-6.25) 37,-6.25 cw(c36.25,-6.25) 36.25,-7 cw(c36.25,-6.25) 35.5,-6.25 cw(c36.25,-6.25)
  pour cut-out: 1.25,-5.5 cw(c1.25,-6.25) 2,-6.25 cw(c1.25,-6.25) 1.25,-7 cw(c1.25,-6.25) 0.5,-6.25 cw(c1.25,-6.25)
  pour cut-out: 1.25,7 cw(c1.25,6.25) 2,6.25 cw(c1.25,6.25) 1.25,5.5 cw(c1.25,6.25) 0.5,6.25 cw(c1.25,6.25)
  pour cut-out: 13.8,-1.25 14.05,-1.5 17,-1.5 17.5,-1 17.5,1.5 17,2 14.5,2 13.8,1.3
  pour cut-out: 28,1.5 28,4.5 32,4.5 32,1.5
  pour cut-out: 25.5,-0.25 28.5,-0.25 28.5,-2.75 25.5,-2.75

## Silkscreen, mask and mechanical layers (free items; w line width, h text height)
Top Overlay:
  drawing of 31 lines, arcs and shapes, not listed
  text "Banana Schplit" at 20.395,5.361 h3
  text "+9V" at 39.4,4.325 h1.5
  text "-9V" at 39.4,-5.675 h1.5
Bottom Overlay:
  drawing of 5 lines, arcs and shapes, not listed
  text "PS 2/23" at 5.105,5.81 h2
  text "MAX 0.5A" at 34.29,2.033 h1
  text "+9V" at 37.465,1.865 h1.5
  text "GND" at 37.465,-0.675 h1.5
  text "www.phils-lab.net" at 29.025,-0.68 h4
  text "MAX 0.5A" at 34.29,-3.047 h1
  text "[                     ]" at 24.125,-3.14 h1
  text "-9V" at 37.465,-3.215 h1.5
  text "S/N" at 22.066,-4.3 h1
  text "B" at 1.896,-6.751 h2
Top Courtyard:
  lines w0.1: 0,-6.646 ccw(c0.854,-6.646) 0.854,-7.5 41.646,-7.5 ccw(c41.646,-6.646) 42.5,-6.646 42.5,6.646 ccw(c41.646,6.646) 41.646,7.5 0.854,7.5 ccw(c0.854,6.646) 0,6.646 0,0 0,-6.646

## Text inside footprints (layer, text, board x,y; h text height)
D1: Mechanical 13 "+" at 13.258,-2.117 h0.5 r270
D4: Mechanical 13 "+" at 42.883,5.992 h0.5 r180
D5: Mechanical 13 "+" at 42.883,-7.008 h0.5 r180